# Altium PCB temp.PcbDoc
Units mil, origin at the board's own origin, x right, y up, seen from the top; angles counter-clockwise.
Board outline 6000 x 4000 mil, 4 copper layers (Top Layer, GND, VCC, Bottom Layer), stack 30.634 mil thick; 27 components, 16 nets, 81 pads, 4 vias.
Unrouted connection lines stored in the file: 55.
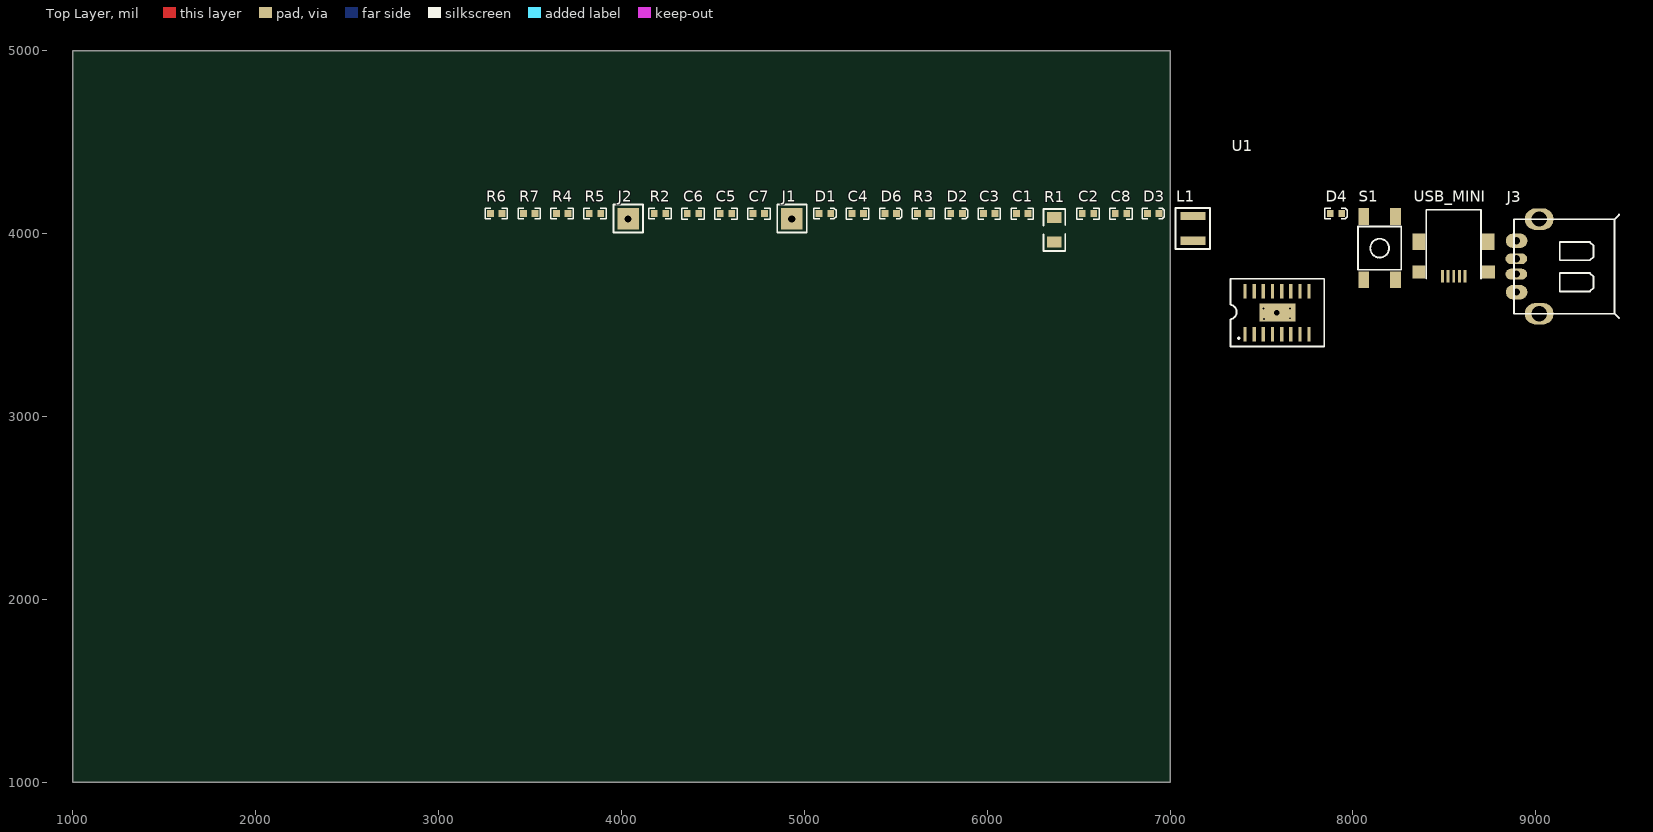
[diagram p0: Top Layer view]
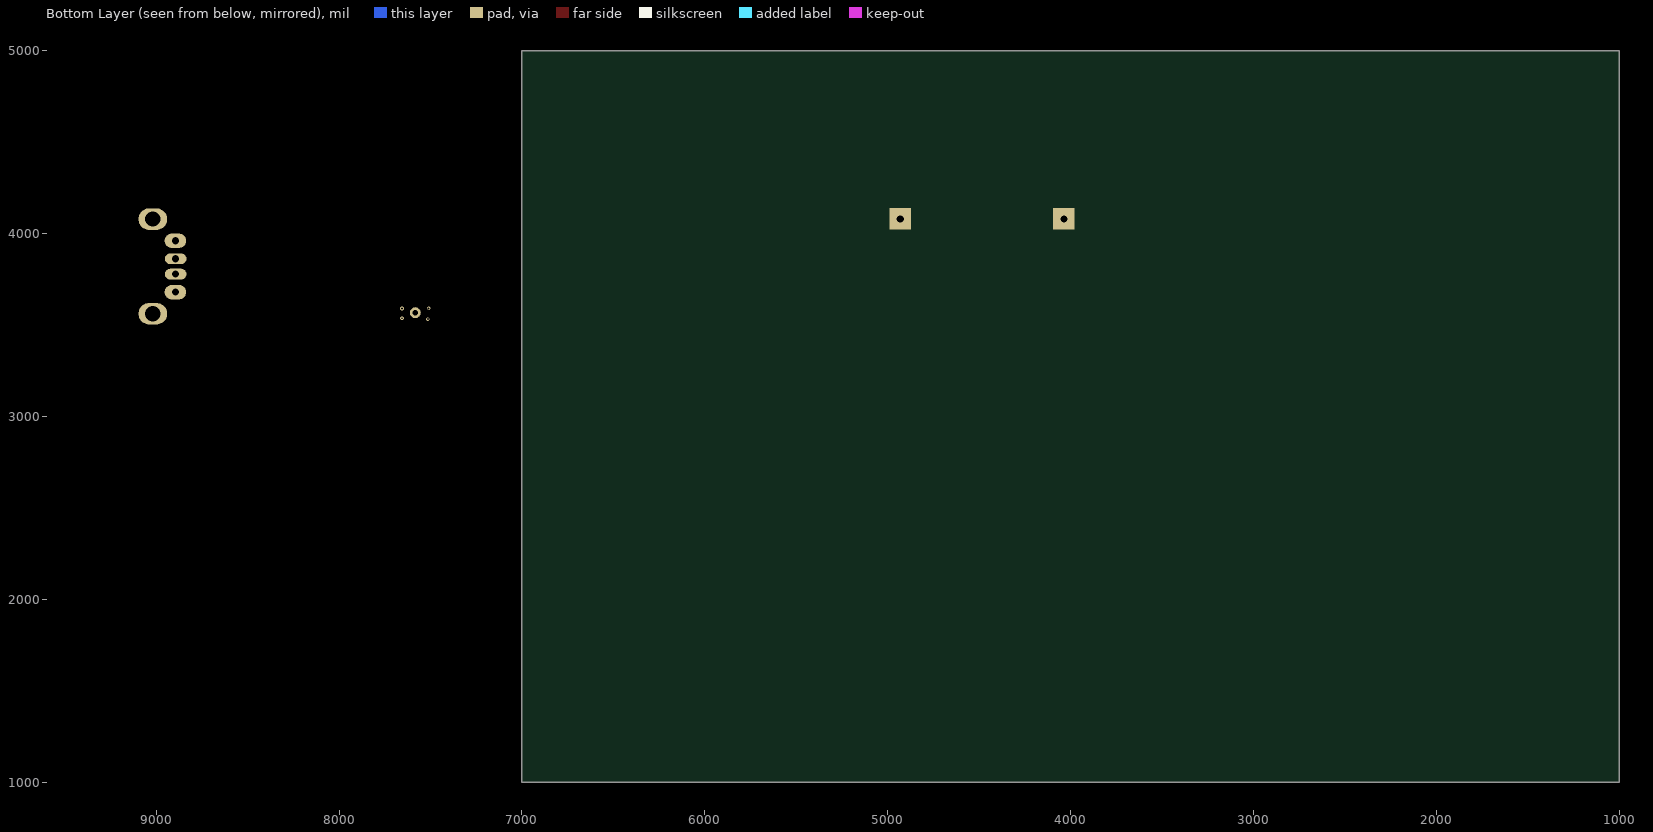
[diagram p1: Bottom Layer view, seen from below]
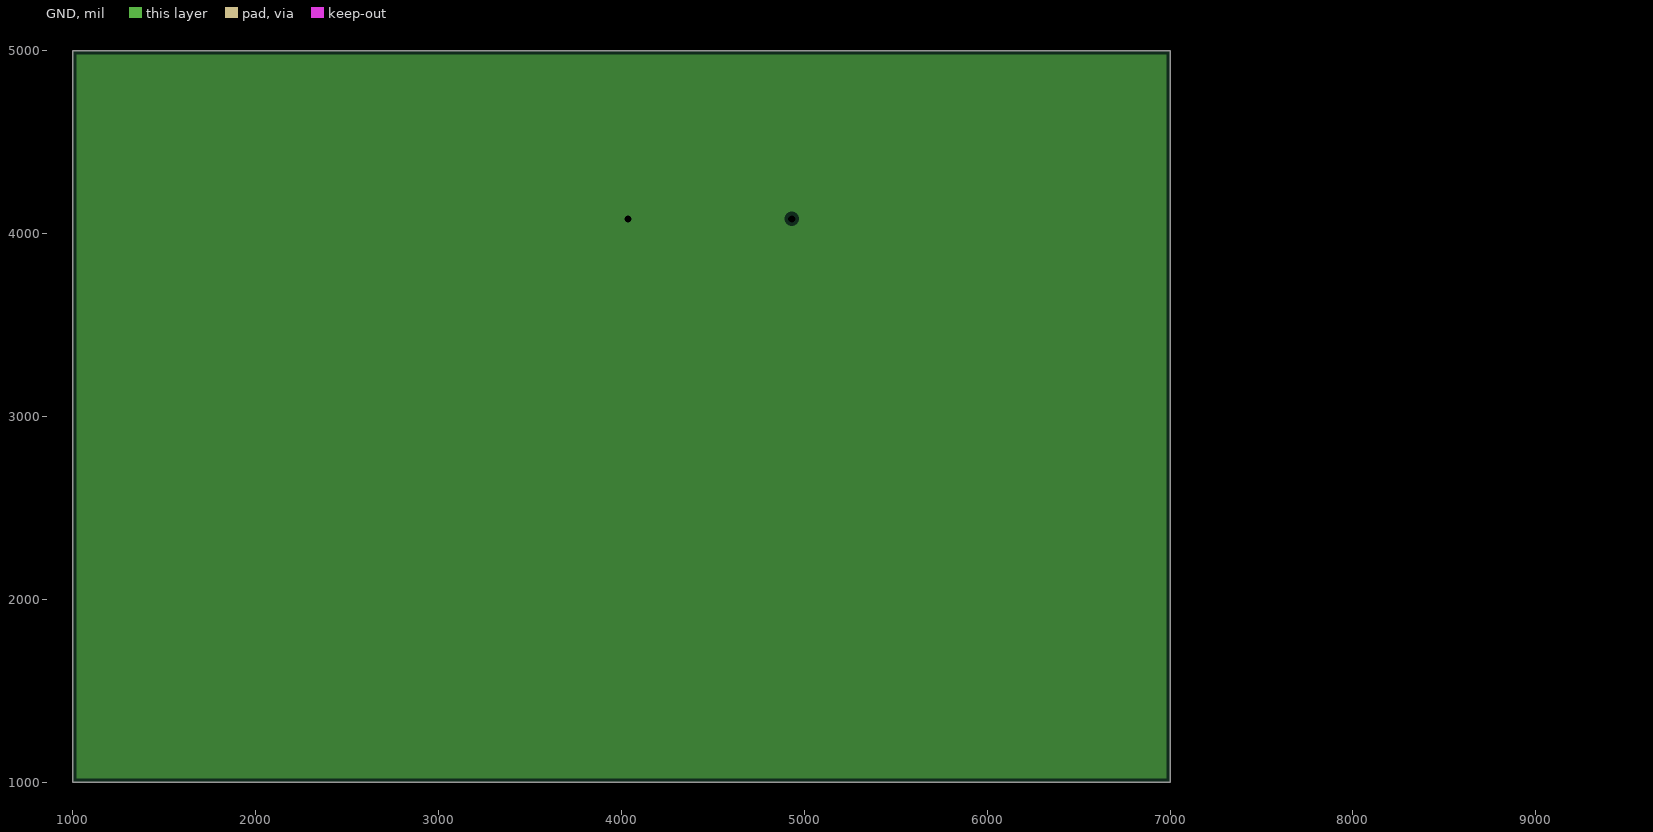
[diagram p2: GND, clearances drawn from the general rule]
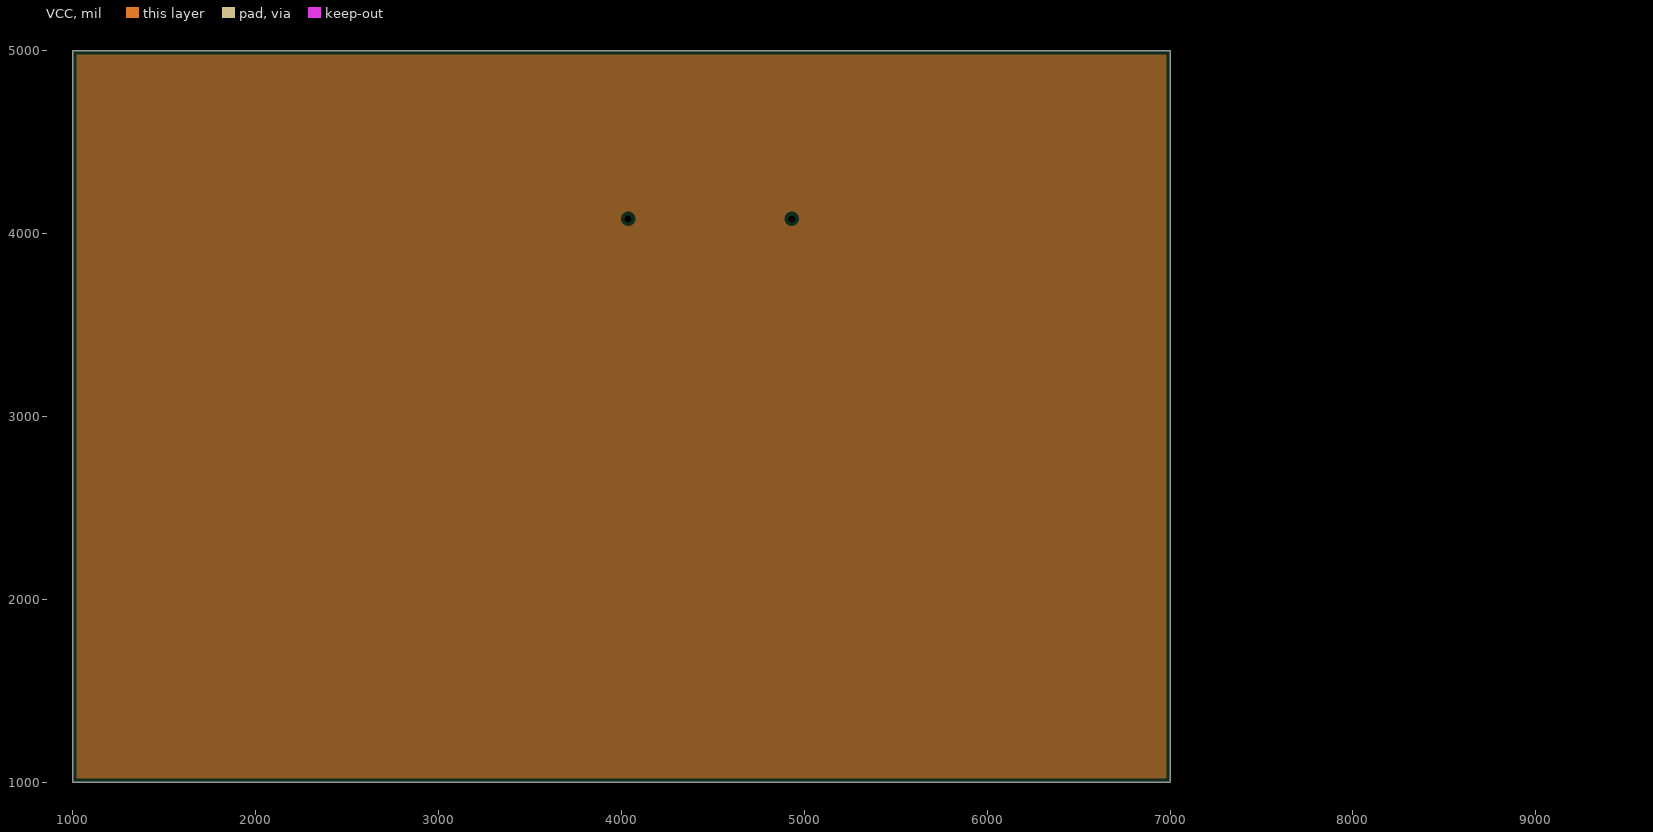
[diagram p3: VCC, clearances drawn from the general rule]

## Layer stack, top to bottom
Top Solder: solder mask 0.4, Solder Resist, Dk 3.5
Top Layer: signal copper 1.4
Dielectric 1: core 10, FR-4, Dk 4.2
GND: plane copper 1.417, net GND
Dielectric 3: prepreg 5, Dk 4.2
VCC: plane copper 1.417, net VCC
Dielectric 2: core 10, Dk 4.2
Bottom Layer: signal copper 1.4
Bottom Solder: solder mask 0.4, Solder Resist, Dk 3.5

## Board outline
1000,1000 7000,1000 7000,5000 1000,5000

## Design rules (kind name [scope] priority, off if disabled: settings)
Clearance [All] p1: gap=10
PlaneClearance [All] p1: clearance=20
PlaneConnect [All] p1: planeconnectstyle=Relief reliefexpansion=20 reliefentries=4 reliefconductorwidth=10 reliefairgap=10
PolygonConnect [All] p1: connectstyle=Relief reliefconductorwidth=10 reliefentries=4 polygonreliefangle="90 Angle" airgapwidth=10
RoutingVias [All] p1: holewidth=28 width=50 viastyle="Through Hole" minholewidth=28 minwidth=50 maxholewidth=28 maxwidth=50
SolderMaskExpansion [All] p1: expansion=4
Width [All] p1: maxlimit=10 minlimit=10 preferedwidth=10
28 further rules are at their usual default settings.

## Components (designator, comment, footprint, x,y, rotation, side; value= is the part's Value field where it differs from the comment)
C1 "10UF" 0603_CAP 6190.99,4111 r0 top
C2 "10UF" 0603_CAP 6550.99,4111 r0 top
C3 "102" 0603_CAP 6010.99,4111 r0 top
C4 "2.2N" 0603_CAP 5290.99,4111 r0 top
C5 "10UF" 0603_CAP 4570.99,4111 r0 top
C6 "10UF" 0603_CAP 4390.99,4111 r0 top
C7 "10UF" 0603_CAP 4750.99,4111 r0 top
C8 "2.2UF" 0603_CAP 6730.99,4111 r0 top
D1 "LED2" LED_0603 5080.99,4111 r0 top
D2 "LED2" LED_0603 5800.99,4111 r0 top
D3 "LED2" LED_0603 6875.99,4111 r0 top
D4 "LED2" LED_0603 7875.99,4111 r0 top
D6 "LED2" LED_0603 5440.99,4111 r0 top
J1 "CON1" BAT 4930.99,4081 r0 top
J2 "CON1" BAT 4035.99,4081 r0 top
J3 "USB" USB4 8955.99,3821 r0 top
L1 "1UH" 4030 7125.99,3961 r0 top
R1 "0.01R 1%" 1206_RES 6365.99,4021 r90 top
R2 "1K" 0603_RES 4210.99,4111 r0 top
R3 "1K" 0603_RES 5650.99,4111 r0 top
R4 "160K" 0603_RES 3675.99,4111 r0 top
R5 "300K" 0603_RES 3855.99,4111 r0 top
R6 "43K" 0603_RES 3315.99,4111 r0 top
R7 "300K" 0603_RES 3495.99,4111 r0 top
S1 "SW DIP-2" "BUTTON 6 * 6" 8145.99,3921 r90 top
U1 "FM3209F" "ESOP - 16" 7410,3450 r0 top
USB_MINI "USB-M" USB-mini 8550.99,3891 r0 top

## Footprints (in the part's own frame and the unit in brackets; to place one, negate y for a bottom-side part, rotate by r counter-clockwise, add the part's x,y. Pads: shape width x height; smd on the part's side, far side on the other; paste and mask are expansions set on the pad)
0603_CAP [mm]
  rect 0.95x1 smd: 1(-0.787,-0.025) 2(0.813,-0.025)
  silkscreen extent -1.54,-0.78 1.56,0.72, body extent -0.8,-0.43 0.9,0.37, height 0.56
0603_RES [mm]
  rect 0.95x1 smd: 1(-0.813,0) 2(0.787,0)
  silkscreen extent -1.56,-0.75 1.54,0.75, body extent -0.82,-0.4 0.88,0.4, height 0.56
1206_RES [mm]
  rect 1.52x2 smd: 1(-1.71,0) 2(1.71,0)
  silkscreen extent -2.92,-1.55 2.92,1.47, body extent -1.68,-0.89 1.68,0.84, height 0.85
4030 [mm]
  rect 3.5x1.15 smd: 1(0,0) 2(0,3.45)
  silkscreen extent -2.44,-1.14 2.34,4.57
BAT [mm]
  rect 3x3 hole 1: 1(0,0)
  silkscreen extent -2.01,-1.91 2.08,1.98
"BUTTON 6 * 6" [mm]
  rect 2.3x1.5 smd: 1(-4.4,2.2) 2(4.4,2.2) 3(-4.4,-2.2) 4(4.4,-2.2)
  silkscreen extent -3,-3 3,3, body extent -5,-3 5,3, height 5.1
"ESOP - 16" [mm]
  rect 0.45x2 smd: 1(0,0) 2(1.27,0) 3(2.54,0) 4(3.81,0) 5(5.08,0) 6(6.35,0) 7(7.62,0) 8(8.89,0) 9(8.89,6) 10(7.62,6) 11(6.35,6) 12(5.08,6) 13(3.81,6) 14(2.54,6) 15(1.27,6) 16(0,6)
  round 1.524 hole 0.762: 17(4.394,2.997)
  rect 5x2.5 smd: 17(4.5,3)
  silkscreen extent -2.03,-1.68 11,7.72
LED_0603 [mm]
  rect 0.95x1 smd: 1(0,0) 2(1.6,0)
  silkscreen extent -0.75,-0.76 2.35,0.75, body extent -0.05,-0.45 1.65,0.45, height 0.9
USB4 [mm]
  oval 3x2 hole 1: 1(-1.559,3.566) 4(-1.559,-3.566)
  oval 3x1.5 hole 1: 2(-1.585,1.066) 3(-1.585,-1.066)
  oval 4x3 hole 2.1: USB1(1.585,6.566) USB2(1.585,-6.566)
  silkscreen extent -1.92,-7.18 12.69,7.2, body extent -1.59,-7.3 12.64,7.3, height 5.1
USB-mini [mil]
  rect 70x70 smd: 0(-190,-100) 0(190,-100)
  rect 70x90 smd: 0(-190,65) 0(187,65)
  rect 15x70 smd: 1(62,-123) 2(31,-123) 3(0,-123) 4(-62,-123) NC(-31,-123)
  silkscreen extent -150,-135 150,240

## Part data
C1 C2 C3 C4: library part Cap, "Capacitor"
C5 C6 C7 C8: library part "Cap Pol1", "Polarized Capacitor (Radial)"
D1 D2 D3 D4 D6: "Typical RED, GREEN, YELLOW, AMBER GaAs LED"
L1: library part Inductor, "Inductor"
R1 R2 R3 R4 R5 R6 R7: library part Res2, "Resistor"
S1: "DIP Switch, 2 Position, SPST"

## Via types
v1: diameter 20, hole 10, Top Layer to Bottom Layer, 4 vias

## Nets (pads, with @x,y where several pads share a name; then routed paths per layer and width w, separated by ;. In a path a pad name is that pad's centre, name@x,y a point inside that pad or via, vN(x,y) a via of type N, cw(c..) or ccw(c..) an arc to the next point about the centre after c; other vN are vias at no path point)
B+: C1.2 J1.1 R1.1 U1.4
CHGS: C2.2 D6.1 L1.1 R1.2 U1.2
D+: J3.3 R6.2 R7.1
D-: J3.2 R4.2 R5.1
GND: C1.1 C2.1 C3.2 C5.2 C6.2 C7.2 C8.2 D1.2 D2.2 D3.2 D4.2 J2.1 J3.4 R2.1 R5.2 R7.2 S1.1 S1.2 U1.3 U1.16 U1.17 USB_MINI.4
  other v1: 7514,3533 7656,3538 7656,3591 7510,3592
KEY: S1.3 S1.4 U1.1
NetC3_1: C3.1 C4.1 L1.2 U1.5 U1.6
NetD1_1: D1.1 U1.11
NetD2_1: D2.1 U1.12
NetD3_1: D3.1 U1.13
NetD4_1: D4.1 U1.14
NetD6_2: D6.2 R3.1
NetR3_2: R3.2 U1.10
VCC: C8.1 R4.1 R6.1 U1.15
VIN: C7.1 R2.2 U1.9 USB_MINI.1
VOUT: C4.2 C5.1 C6.1 J3.1 U1.7 U1.8
pads on no net: J3.USB1 J3.USB2 USB_MINI.0 USB_MINI.2 USB_MINI.3 USB_MINI.NC

## Polygon pours and split planes (outlines as drawn)
GND on GND (split plane): 6979.9,1020.1 1020.1,1020.1 1020.1,4979.9 6979.9,4979.9
VCC on VCC (split plane): 6979.9,1020.1 1020.1,1020.1 1020.1,4979.9 6979.9,4979.9